# Altium PCB Bottom Layer.PcbDoc
Units mm, origin at the board's own origin, x right, y up, seen from the top; angles counter-clockwise.
Board outline 59 x 59 mm, 2 copper layers (Top Layer, Bottom Layer); 19 components, 30 nets, 87 pads, 2 vias.
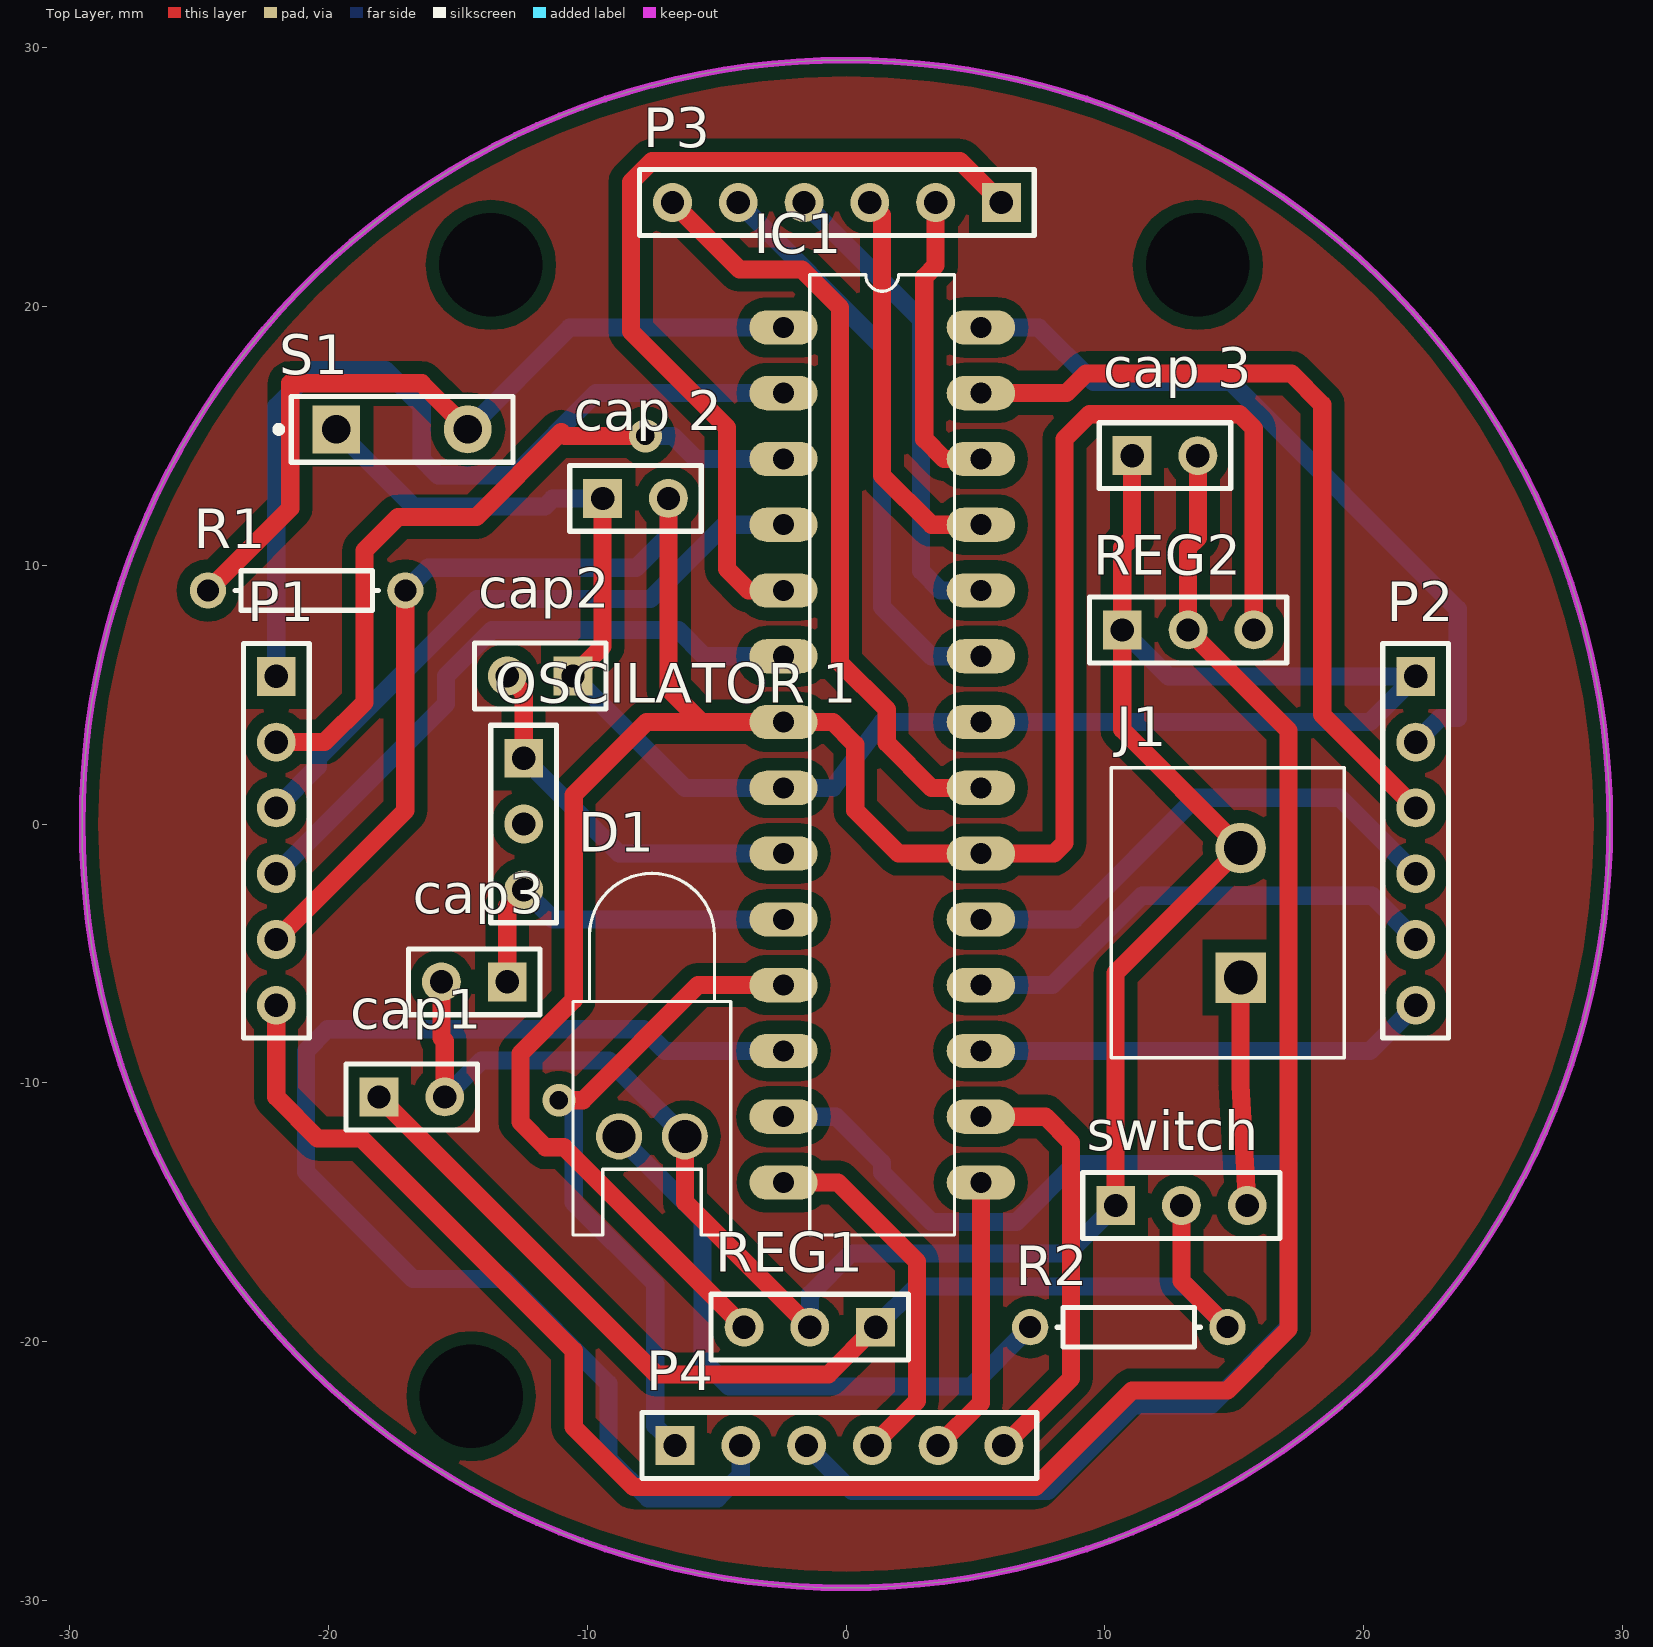
[diagram p0: Top Layer view]
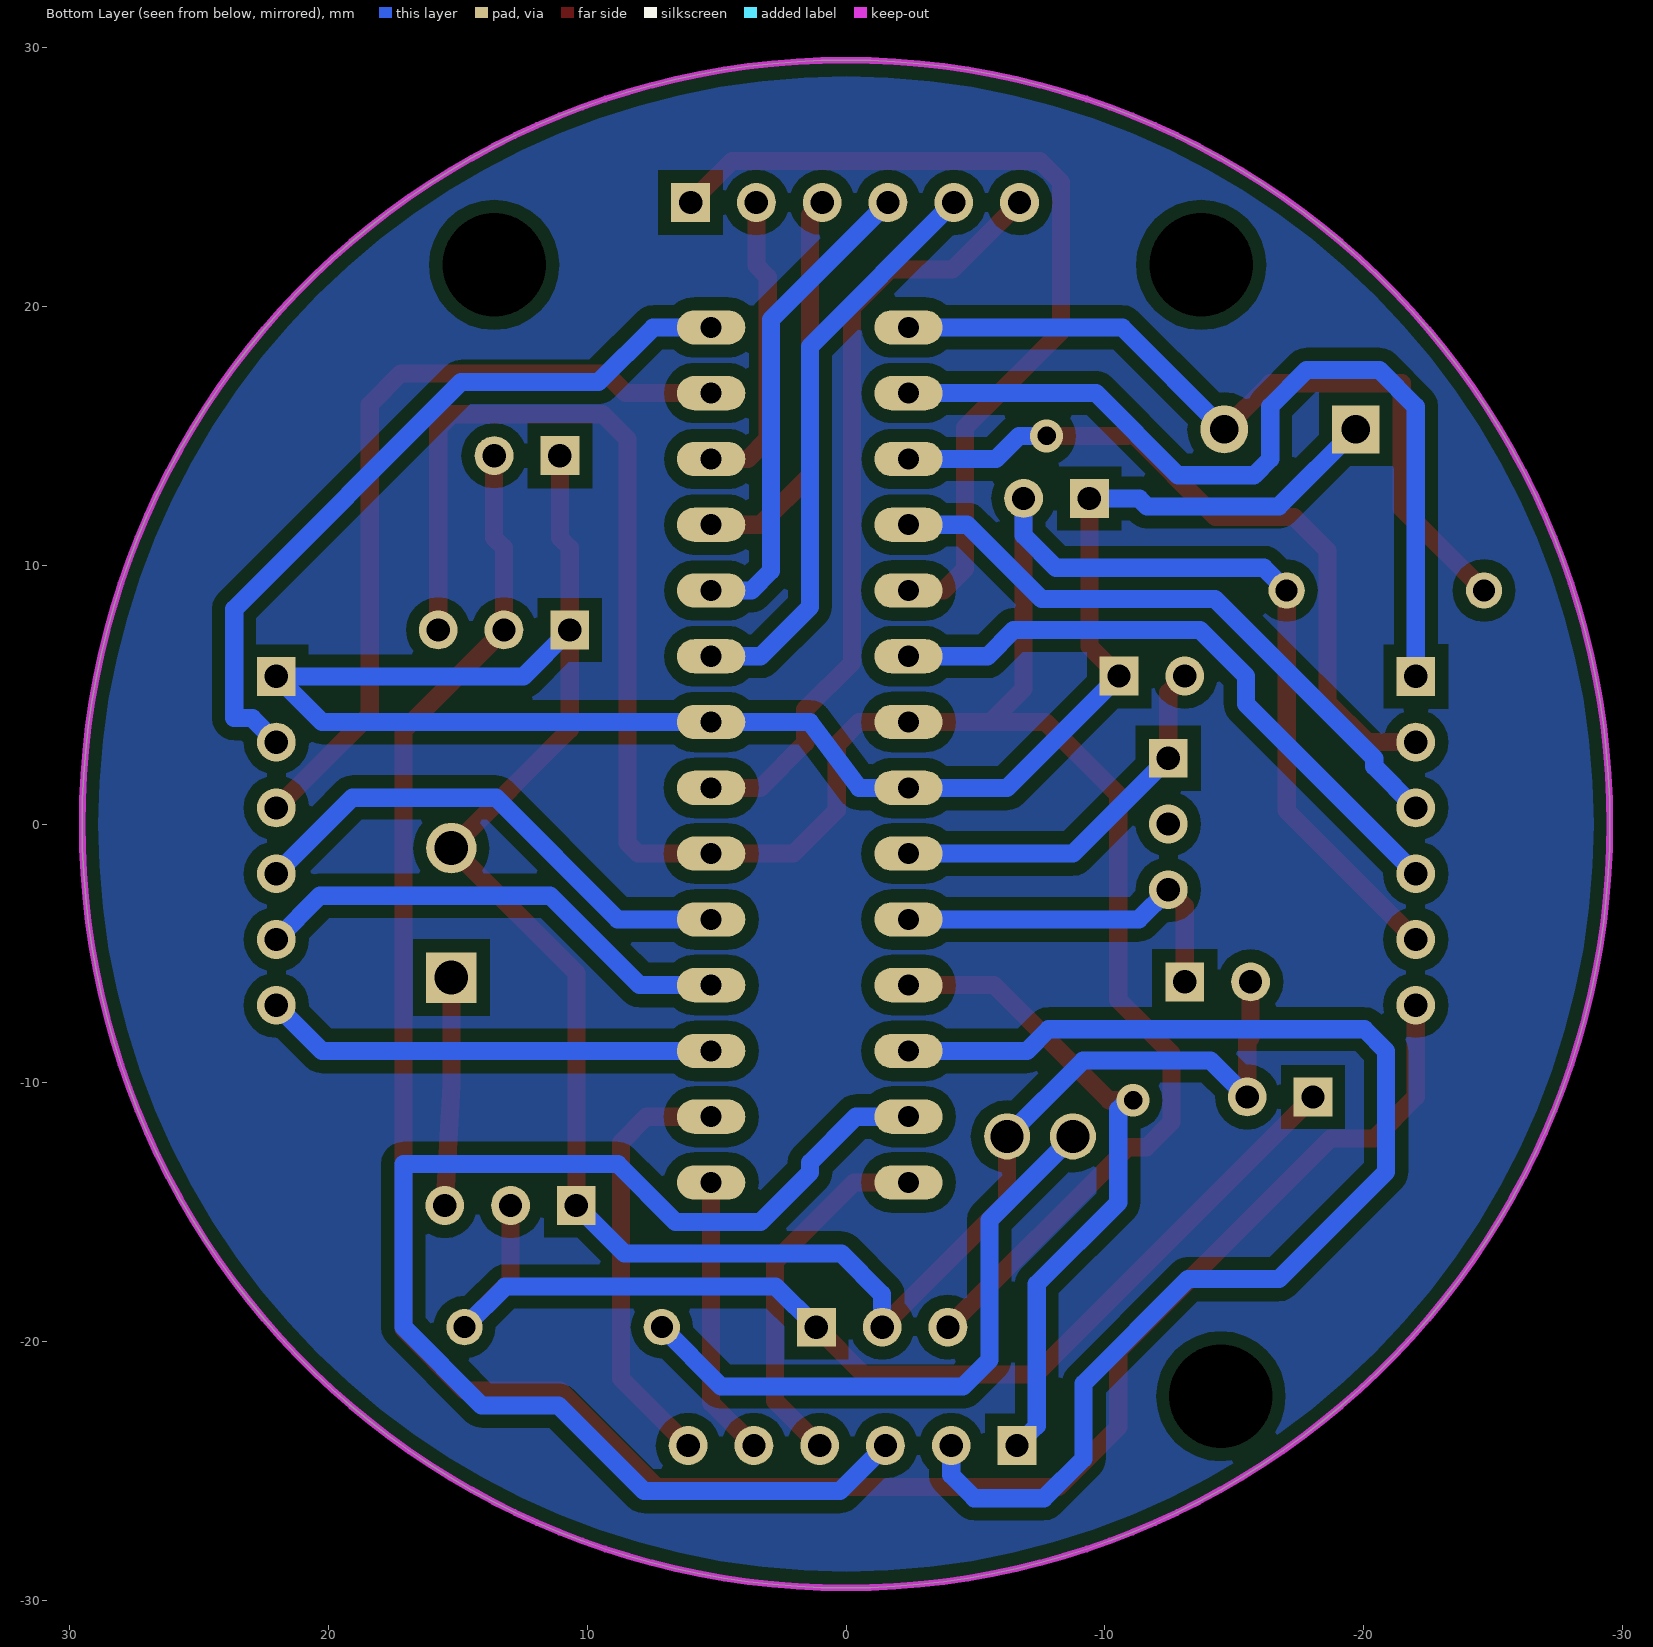
[diagram p1: Bottom Layer view, seen from below]

## Layer stack, top to bottom
Top Solder: solder mask 0.0102, Solder Resist, Dk 3.5
Top Layer: signal copper 0.0356
Dielectric 1: dielectric 0.32, FR-4, Dk 4.8
Bottom Layer: signal copper 0.0356
Bottom Solder: solder mask 0.0102, Solder Resist, Dk 3.5

## Board outline
-29.5,0 ccw(c0,0) 0,-29.5 ccw(c0,0) 29.5,0 ccw(c0,0) 0,29.5 ccw(c0,0)

## Design rules (kind name [scope] priority, off if disabled: settings)
Clearance [All] p1: gap=0.5 ignorepadtopadclearanceinfootprint=FALSE
ComponentClearance [All] p1: gap=0 collisioncheckmode=3 verticalgap=0 showdistances=FALSE
PolygonConnect [All] p1: connectstyle=Relief reliefconductorwidth=0.254 reliefentries=4 polygonreliefangle="90 Angle" airgapwidth=0.254
RoutingVias [All] p1: holewidth=0.711 width=1.27 viastyle="Through Hole" minholewidth=0.711 minwidth=1.27 maxholewidth=0.711 maxwidth=1.27
SolderMaskExpansion [All] p1: expansion=0.102
Width [All] p1: maxlimit=1 minlimit=0.5 preferedwidth=0.7
29 further rules are at their usual default settings.

## Components (designator, comment, footprint, x,y, rotation, side; value= is the part's Value field where it differs from the comment)
cap1 "Header 2" HDR1X2 -18.034,-10.541 r0 top
cap2 "Header 2" HDR1X2 -10.541,5.715 r180 top
cap3 "Header 2" HDR1X2 -13.081,-6.096 r180 top
"cap 2" "Header 2" HDR1X2 -9.398,12.573 r0 top
"cap 3" "Header 2" HDR1X2 11.049,14.224 r0 top
D1 "LED0" LED-0 -7.493,-12.065 r180 top
IC1 "ATMEGA328-PU" *DIL28 1.397,2.667 r0 top
J1 "OSTTA020161" *OST_OSTTA020161 15.24,-3.429 r90 top
"OSCILATOR 1" "Header 3" HDR1X3 -12.446,2.54 r270 top
P1 "Header 6" HDR1X6 -22,5.7 r270 top
P2 "Header 6" HDR1X6 22,5.7 r270 top
P3 "Header 6" HDR1X6 6,24 r180 top
P4 "Header 6" HDR1X6 -6.604,-24 r0 top
R1 "Res1" AXIAL-0.3 -20.828,9.017 r0 top value=1K
R2 "Res1" AXIAL-0.3 10.922,-19.431 r180 top value=1K
REG1 "Header 3" HDR1X3 1.143,-19.431 r180 top
REG2 "Header 3" HDR1X3 10.668,7.493 r0 top
S1 "SW-PB" SPST-2 -17.145,15.24 r0 top
switch "Header 3" HDR1X3 10.414,-14.732 r0 top

## Footprints (in the part's own frame and the unit in brackets; to place one, negate y for a bottom-side part, rotate by r counter-clockwise, add the part's x,y. Pads: shape width x height; smd on the part's side, far side on the other; paste and mask are expansions set on the pad)
*DIL28 [mil]
  oval 104x52 hole 32: 1(-150,650) 2(-150,550) 3(-150,450) 4(-150,350) 5(-150,250) 6(-150,150) 7(-150,50) 8(-150,-50) 9(-150,-150) 10(-150,-250) 11(-150,-350) 12(-150,-450) 13(-150,-550) 14(-150,-650) 15(150,-650) 16(150,-550) 17(150,-450) 18(150,-350) 19(150,-250) 20(150,-150) 21(150,-50) 22(150,50) 23(150,150) 24(150,250) 25(150,350) 26(150,450) 27(150,550) 28(150,650)
  silkscreen extent -110,-730 110,730, body extent -199,-705 195,695, height 319
*OST_OSTTA020161 [mm]
  rect 1.95x1.95 hole 1.3: 1(-2.5,0)
  round 1.95 hole 1.3: 2(2.5,0)
  silkscreen extent -5.6,-4 5.6,5
AXIAL-0.3 [mm] "Axial Device, Thru-Hole; 2 Leads; 0.3 in Pin Spacing"
  round 1.4 hole 0.85: 1(-3.81,0) 2(3.81,0)
  silkscreen extent -2.77,-0.76 2.77,0.76
HDR1X2 [mm] "Connector; Header; 2 Position"
  rect 1.5x1.5 hole 0.9: 1(0,0)
  round 1.5 hole 0.9: 2(2.54,0)
  silkscreen extent -1.27,-1.27 3.81,1.27
HDR1X3 [mm] "Connector; Header; 3 Position"
  rect 1.5x1.5 hole 0.9: 1(0,0)
  round 1.5 hole 0.9: 2(2.54,0) 3(5.08,0)
  silkscreen extent -1.27,-1.27 6.35,1.27
HDR1X6 [mm] "Connector; Header; 6 Position"
  rect 1.5x1.5 hole 0.9: 1(0,0)
  round 1.5 hole 0.9: 2(2.54,0) 3(5.08,0) 4(7.62,0) 5(10.16,0) 6(12.7,0)
  silkscreen extent -1.27,-1.27 13.97,1.27
LED-0 [mil] "LED; 2 Leads"
  round 70 hole 50: 1(50,0) 2(-50,0)
  silkscreen extent -120,-400 120,150
SPST-2 [mm] "Switch; 2 Leads"
  rect 1.85x1.85 hole 1.1: 1(-2.54,0)
  round 1.85 hole 1.1: 2(2.54,0)
  silkscreen extent -4.89,-1.27 4.28,1.27

## Part data
cap1 cap2 cap3 "cap 2" "cap 3": "Header, 2-Pin", LatestRevisionDate=17-Jul-2002, LatestRevisionNote="Re-released for DXP Platform.", Publisher="Altium Limited"
D1: "Typical INFRARED GaAs LED", LatestRevisionDate=08-Jul-2005, LatestRevisionNote="Mech Layer 1 removed.", PackageDescription="LED; 2 Leads", PackageReference=LED-0, Published=8-Jun-2000, Publisher="Altium Limited"
IC1: "ATmega Series 20 MHz 32 KB Flash 2 KB SRAM 8-Bit Microcontroller - DIP-28", Package="PDIP-28 Microchip", Availability=Unavailable, MF=Microchip, MP=ATMEGA328-PU, Price=None, SnapEDA_Link=https://www.snapeda.com/parts/ATMEGA328-PU/Microchip/view-part/?ref=snap
J1: "Connector Terminal Blocks 2 Position 5mm Solder Straight Thru-Hole 16A", Package=None, Availability=Unavailable, MF="On Shore", MP=OSTTA020161, Price=None, SnapEDA_Link=https://www.snapeda.com/parts/OSTTA020161/On%20Shore%20Technology%20Inc./view-part/?ref=snap
"OSCILATOR 1" REG1 REG2 switch: "Header, 3-Pin", LatestRevisionDate=17-Jul-2002, LatestRevisionNote="Re-released for DXP Platform.", Publisher="Altium Limited"
P1 P2 P3 P4: "Header, 6-Pin", LatestRevisionDate=17-Jul-2002, LatestRevisionNote="Re-released for DXP Platform.", Publisher="Altium Limited"
R1 R2: "Resistor", LatestRevisionDate=17-Jul-2002, LatestRevisionNote="Re-released for DXP Platform.", PackageDescription="Axial Device, Thru-Hole; 2 Leads; 0.3 in Pin Spacing", PackageReference=AXIAL-0.3, Published=8-Jun-2000, Publisher="Altium Limited"
S1: "Switch", LatestRevisionDate=17-Jul-2002, LatestRevisionNote="Re-released for DXP Platform.", PackageDescription="Switch; 2 Leads", PackageReference=SPST-2, Published=24-Mar-1999, Publisher="Altium Limited"

## Free pads (board coordinates)
  round 0 hole 4: 2(-14.478,-22.098) 2(-13.716,21.59) 2(13.589,21.59)

## Via types
v1: diameter 1.27, hole 0.711, Top Layer to Bottom Layer, 2 vias

## Nets (pads, with @x,y where several pads share a name; then routed paths per layer and width w, separated by ;. In a path a pad name is that pad's centre, name@x,y a point inside that pad or via, vN(x,y) a via of type N, cw(c..) or ccw(c..) an arc to the next point about the centre after c; other vN are vias at no path point)
"3.3 volt": "cap 3.2" P1.6 REG2.2 | length 88.6
  Top Layer w0.7: P1.6 -22,-10.541 -20.4,-12.141 -18.711,-12.141 -10.516,-20.337 -10.516,-23.292 -8.204,-25.603 7.315,-25.603 11.049,-21.869 14.732,-21.869 17.094,-19.507 17.094,3.607 REG2.2 13.208,10.668 13.589,11.049 13.589,14.224
"5 volt": "cap 2.2" IC1.7 IC1.20 P1.5 R1.2 REG1.3 REG2.3 | length 117.8
  Top Layer w0.7: P1.5 -17.018,0.522 R1.2 ; -6.858,12.573 -6.858,5.207 -5.588,3.937 ; REG1.3 -10.885,-12.483 -11.6,-12.483 -12.572,-11.511 -12.572,-8.856 -10.516,-6.8 -10.516,1.118 -7.696,3.937 -5.588,3.937 ; REG2.3 15.748,15.265 15.189,15.824 9.398,15.824 8.433,14.859 8.433,-0.737 8.026,-1.143 IC1.20 2.032,-1.143 0.356,0.533 0.356,3.073 -0.508,3.937 IC1.7 -5.588,3.937
  Bottom Layer w0.7: R1.2 -16.142,9.893 -8.116,9.893 -6.858,11.151 -6.858,12.573
"Analog 0": IC1.23 P3.5 | length 22.5
  Bottom Layer w0.7: P3.5 1.397,18.443 1.397,8.382 3.302,6.477 IC1.23
"Analog 1": IC1.24 P3.4 | length 18.7
  Bottom Layer w0.7: P3.4 2.896,19.484 2.896,9.779 3.658,9.017 IC1.24
"Analog 2": IC1.25 P3.3 | length 15.3
  Top Layer w0.7: P3.3 1.397,23.523 1.397,13.462 3.302,11.557 IC1.25
"Analog 3": IC1.26 P3.2 | length 11.8
  Top Layer w0.7: P3.2 3.46,21.565 3.023,21.127 3.023,14.859 3.785,14.097 IC1.26
AREF: IC1.21 P3.6 | length 30.1
  Top Layer w0.7: P3.6 -4.112,21.412 -1.702,21.412 -0.229,19.939 -0.229,6.223 1.575,4.42 1.575,3.124 3.302,1.397 IC1.21
BATTERY: J1.1 switch.3 | length 8.8
  Top Layer w0.7: J1.1 15.24,-10.084 switch.3
CS: IC1.6 P1.4 | length 24.5
  Bottom Layer w0.7: P1.4 -15.445,4.635 -15.445,5.714 -13.671,7.487 -6.477,7.487 -5.467,6.477 IC1.6
"Digital 3": IC1.5 P3.1 | length 34.3
  Top Layer w0.7: IC1.5 -3.759,9.017 -4.597,9.855 -4.597,15.316 -8.306,19.025 -8.306,24.79 -7.493,25.603 4.397,25.603 P3.1
"Digital 5": IC1.11 P4.1 | length 25.8
  Top Layer w0.7: v1(-11.087,-10.668) -10.16,-10.668 -5.715,-6.223 IC1.11
  Bottom Layer w0.7: v1(-11.087,-10.668) -10.871,-10.668 -10.516,-11.024 -10.516,-14.618 -7.366,-17.767 -7.366,-23.238 P4.1
"Digital 6": IC1.12 P4.2 | length 49
  Bottom Layer w0.7: P4.2 -4.064,-25.146 -4.953,-26.035 -7.645,-26.035 -9.169,-24.511 -9.169,-21.615 -13.208,-17.577 -16.713,-17.577 -20.853,-13.437 -20.853,-8.763 -20.016,-7.926 -7.823,-7.926 -6.986,-8.763 IC1.12
"Digital 7": IC1.13 P4.3 | length 50.6
  Bottom Layer w0.7: IC1.13 -0.381,-11.303 1.397,-13.081 1.397,-13.462 3.302,-15.367 6.579,-15.367 8.814,-13.132 17.094,-13.132 17.094,-19.431 14.072,-22.454 11.1,-22.454 7.798,-25.756 0.232,-25.756 P4.3
"Digital 8": IC1.14 P4.4 | length 14.2
  Top Layer w0.7: IC1.14 -0.305,-13.843 2.743,-16.891 2.743,-22.273 P4.4
"Digital 9": IC1.15 P4.5 | length 10.8
  Top Layer w0.7: P4.5 5.207,-22.349 IC1.15
"Digital 10": IC1.16 P4.6 | length 16.7
  Top Layer w0.7: IC1.16 7.696,-11.303 8.687,-12.294 8.687,-21.409 P4.6
GND: "cap 2.1" "cap 3.1" cap1.2 cap2.1 cap3.2 D1.2 IC1.8 IC1.22 J1.2 P2.1 REG1.2 REG2.1 S1.1 switch.1 | length 139.8
  Top Layer w0.7: cap3.2 -15.621,-8.255 -15.494,-8.382 cap1.2 ; cap2.1 -9.398,6.858 -9.398,12.573 ; D1.2 -6.223,-14.605 REG1.2 ; switch.1 10.414,-5.755 J1.2 10.668,3.643 REG2.1 10.668,10.668 11.049,11.049 11.049,14.224
  Bottom Layer w0.7: S1.1 -16.71,12.265 -11.63,12.265 -11.322,12.573 -9.398,12.573 ; cap1.2 -14.079,-9.126 -9.162,-9.126 D1.2 ; cap2.1 -6.223,1.397 IC1.8 -0.508,1.397 1.397,3.937 IC1.22 20.237,3.937 P2.1 12.461,5.7 REG2.1 ; REG1.2 -1.397,-18.161 0.178,-16.586 8.56,-16.586 switch.1
INT: IC1.4 P1.3 | length 24.3
  Bottom Layer w0.7: P1.3 -20.4,2.22 -20.4,2.536 -14.249,8.687 -7.544,8.687 -4.674,11.557 IC1.4
MISO: IC1.18 P2.5 | length 18.9
  Bottom Layer w0.7: IC1.18 7.976,-6.223 11.43,-2.769 20.309,-2.769 P2.5
MOSI: IC1.17 P2.6 | length 17.5
  Bottom Layer w0.7: IC1.17 20.237,-8.763 P2.6
NetD1_1: D1.1 R2.2 | length 24
  Bottom Layer w0.7: D1.1 -5.537,-15.291 -5.537,-20.701 -4.521,-21.717 4.826,-21.717 R2.2
"OSCILATOR 1": "OSCILATOR 1.1" cap2.2 IC1.9 | length 15
  Top Layer w0.7: cap2.2 -12.446,5.08 -12.446,2.54
  Bottom Layer w0.7: -12.446,2.54 -8.763,-1.143 IC1.9
"OSCILATOR 2": "OSCILATOR 1.3" cap3.1 IC1.10 | length 14.3
  Top Layer w0.7: cap3.1 -13.081,-3.175 -12.446,-2.54
  Bottom Layer w0.7: -12.446,-2.54 -11.303,-3.683 IC1.10
RESET: IC1.1 R1.1 S1.2 | length 30.7
  Top Layer w0.7: R1.1 -21.463,12.192 -21.463,17.018 -16.383,17.018 S1.2
  Bottom Layer w0.7: S1.2 -10.668,19.177 IC1.1
RX: IC1.2 P1.1 | length 34.8
  Bottom Layer w0.7: P1.1 -22,16.129 -20.603,17.526 -17.78,17.526 -16.383,16.129 -16.383,14.1 -15.748,13.465 -12.827,13.465 -9.655,16.637 IC1.2
SCK: IC1.19 P2.4 | length 20
  Bottom Layer w0.7: IC1.19 8.814,-3.683 13.513,1.016 19.064,1.016 P2.4
SCL: IC1.28 P2.2 | length 29.1
  Bottom Layer w0.7: IC1.28 7.442,19.177 9.55,17.069 14.859,17.069 23.622,8.306 23.622,4.089 22.929,4.089 P2.2
SDA: IC1.27 P2.3 | length 31.1
  Top Layer w0.7: IC1.27 8.509,16.637 9.271,17.399 17.196,17.399 18.39,16.205 18.39,4.23 P2.3
"Switch out": cap1.1 R2.1 REG1.1 switch.2 | length 44.7
  Top Layer w0.7: cap1.1 -7.315,-21.26 -0.686,-21.26 REG1.1 ; switch.2 12.954,-17.653 R2.1
  Bottom Layer w0.7: REG1.1 2.718,-17.856 13.157,-17.856 R2.1
TX: IC1.3 P1.2 | length 28.4
  Top Layer w0.7: P1.2 -20.132,3.16 -18.593,4.699 -18.593,10.566 -17.297,11.862 -14.275,11.862 -10.998,15.138 -10.846,14.986 v1(-7.747,14.986)
  Bottom Layer w0.7: v1(-7.747,14.986) -6.68,14.986 -5.791,14.097 IC1.3
pads on no net: "OSCILATOR 1.2"

## Polygon pours and split planes (outlines as drawn)
no net on Top Layer "Top Layer-No Net" (solid, pour order 42): -29.5,0 ccw(c0,0) 0,-29.5 ccw(c0,0) 29.5,0 ccw(c0,0) 0,29.5 ccw(c0,0)
no net on Bottom Layer "Bottom Layer-No Net" (solid, pour order 43): -29.5,0 ccw(c0,0) 0,-29.5 ccw(c0,0) 29.5,0 ccw(c0,0) 0,29.5 ccw(c0,0)

## Keep-outs
Keep-Out Layer:
  circle w0.254: c0,0 r29.5